# Altium PCB logi-cmos-7725-7670-NoFFC.PcbDoc
Units mil, origin at the board's own origin, x right, y up, seen from the top; angles counter-clockwise.
Board outline 1699 x 1365 mil, 2 copper layers (Top Layer, Bottom Layer); 24 components, 23 nets, 105 pads, 41 vias.
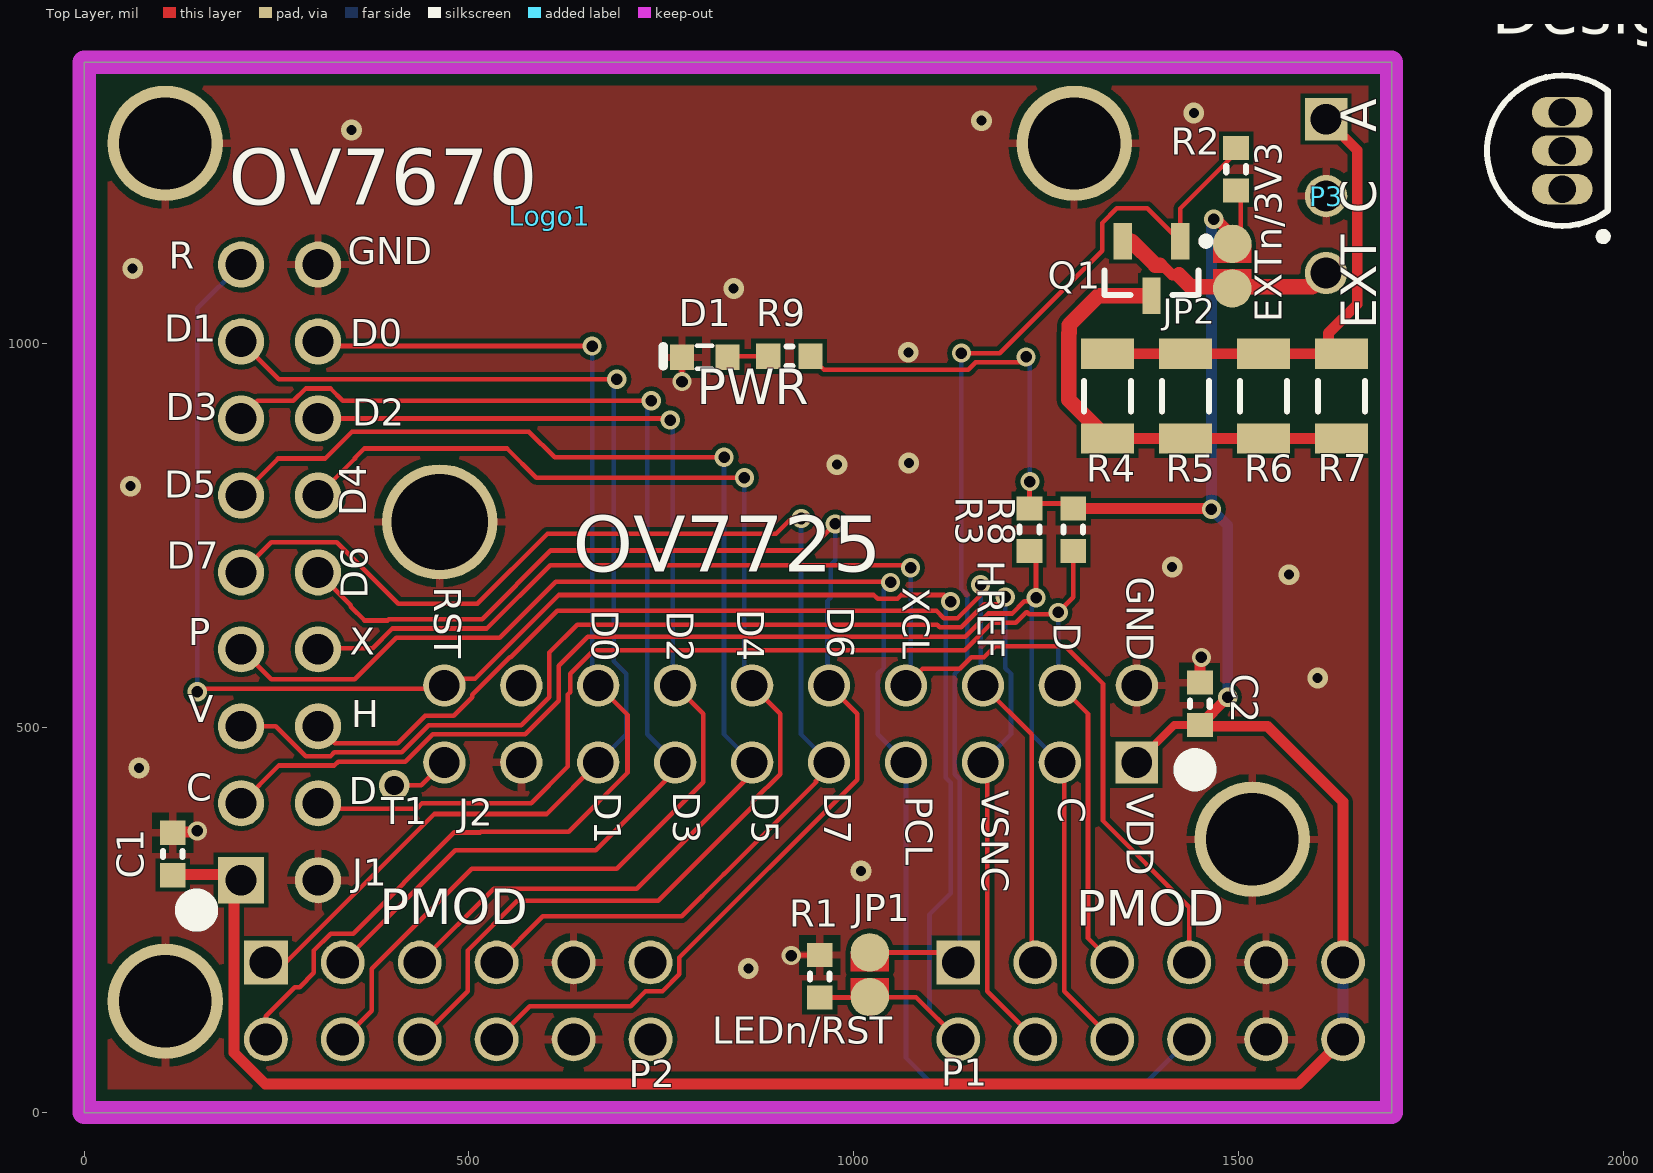
[diagram p0: Top Layer view]
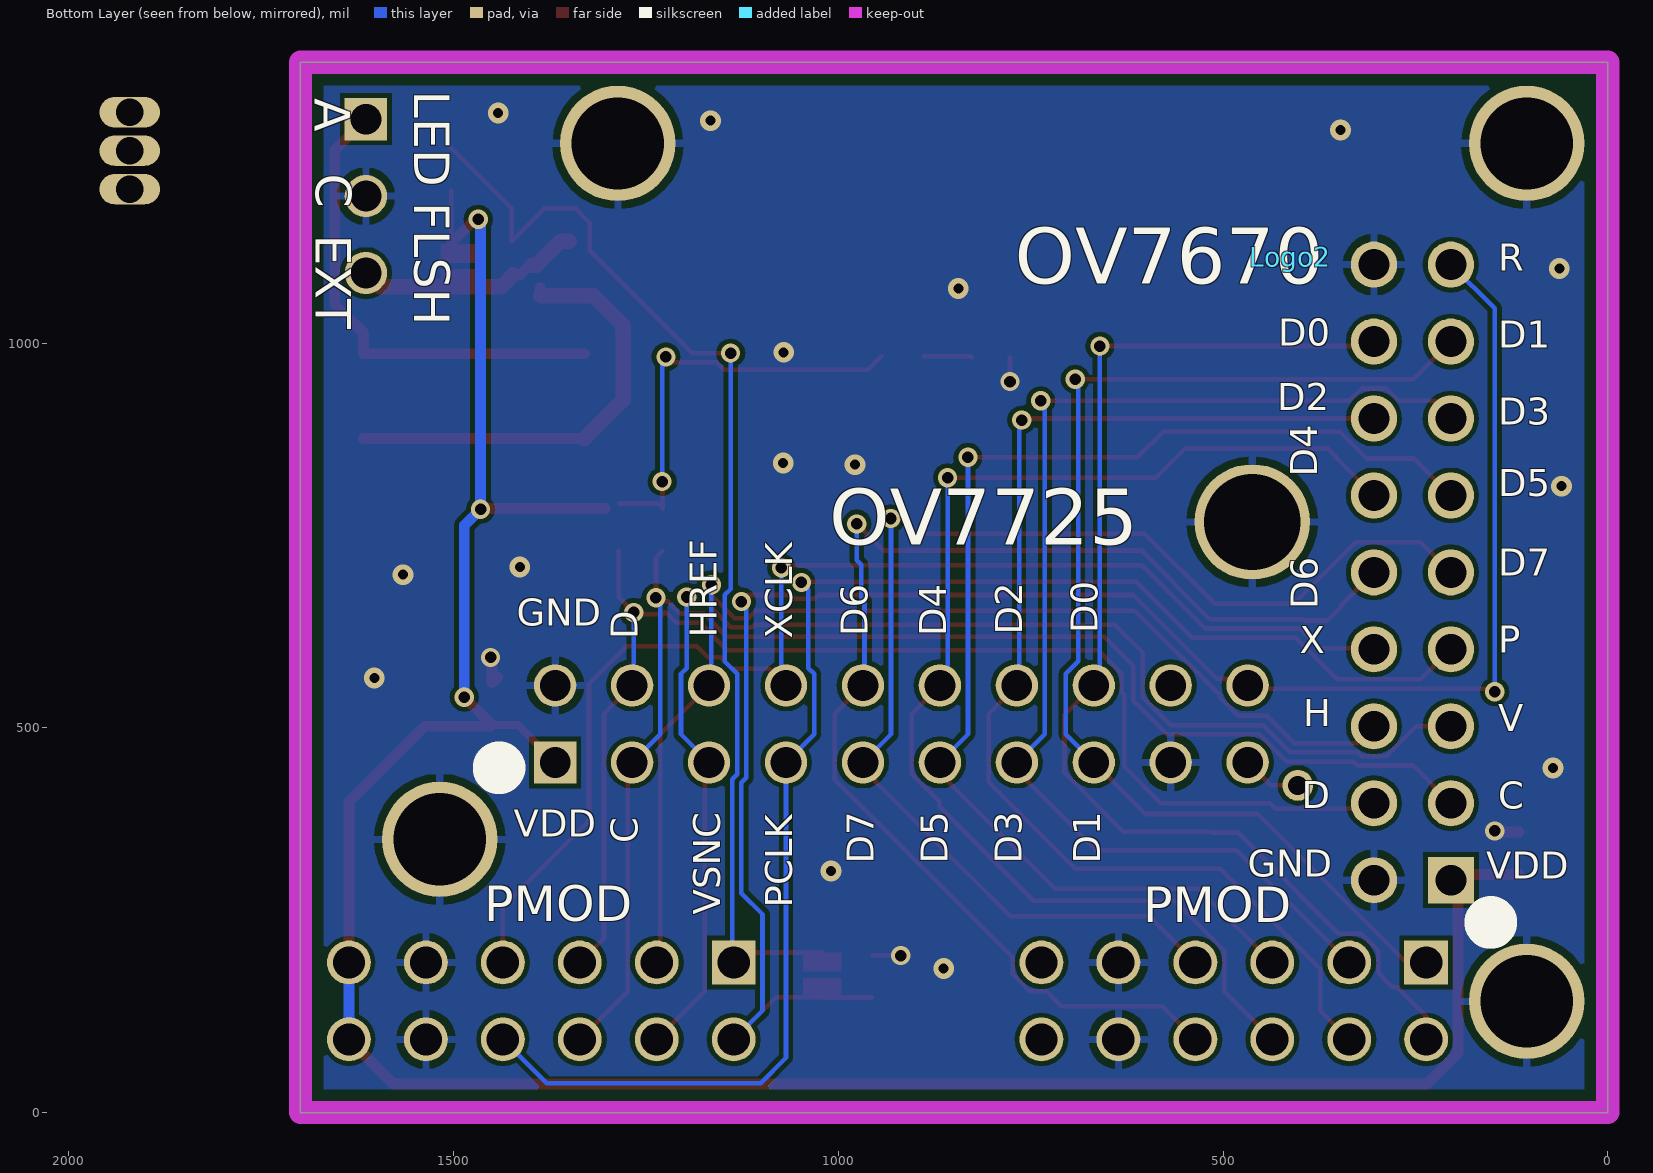
[diagram p1: Bottom Layer view, seen from below]
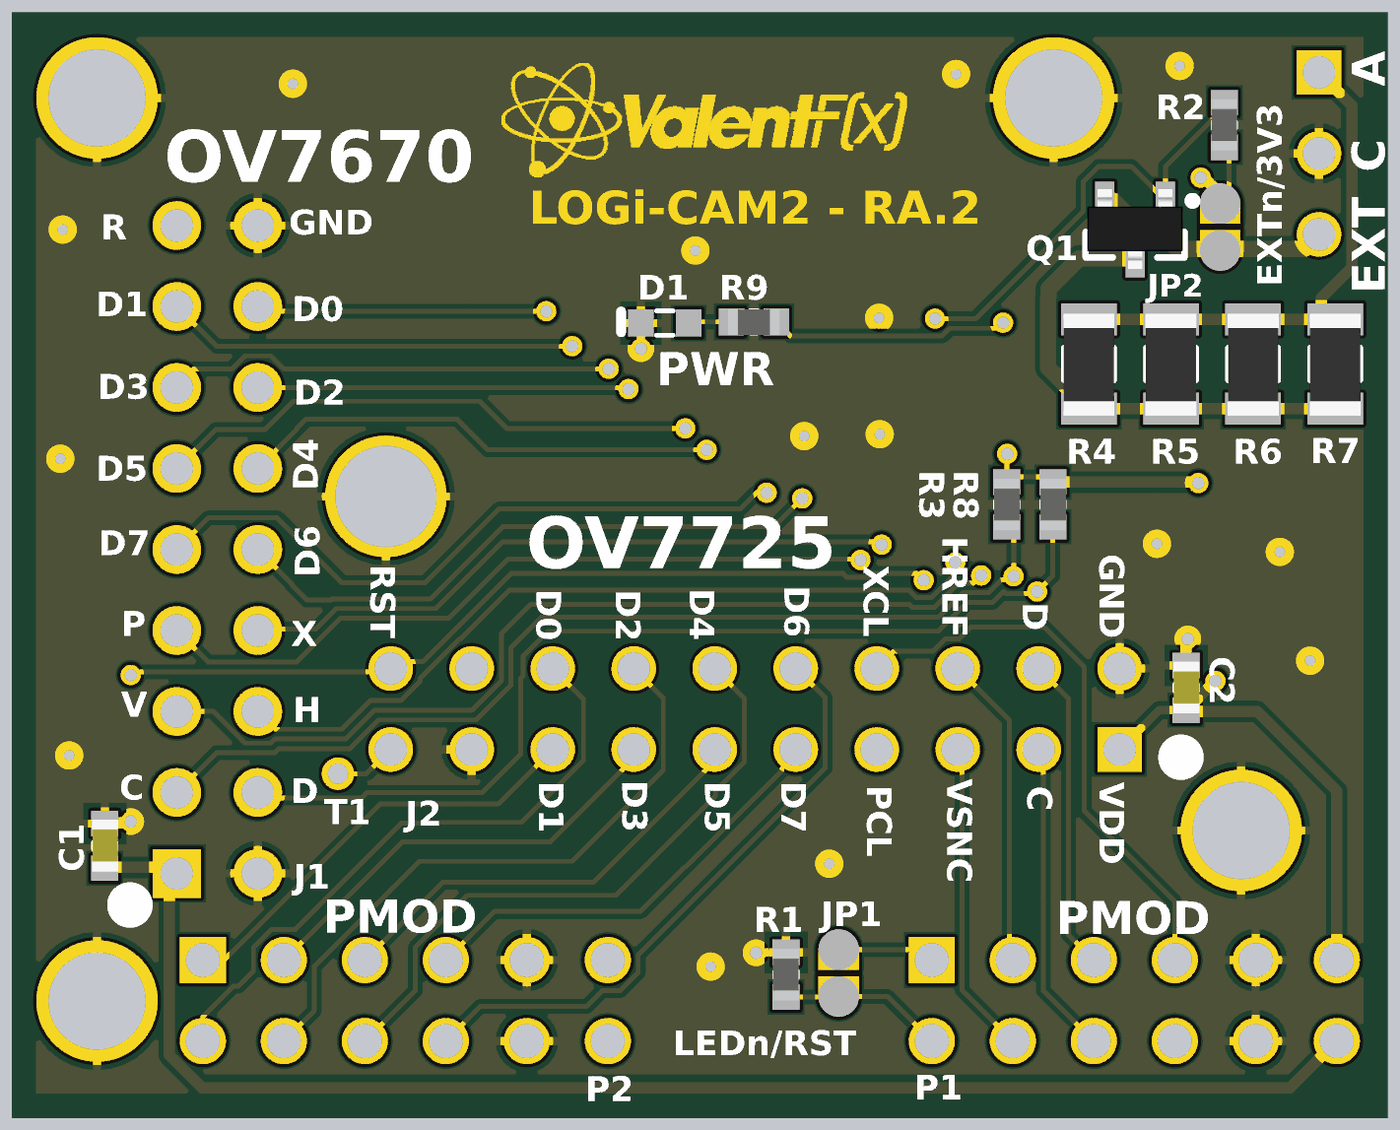
[diagram p2: 3D render of the assembled board from above, using the file's embedded part models]

## Layer stack, top to bottom
Top Solder: solder mask 0.4, Solder Resist, Dk 3.5
Top Layer: signal copper 1.4
Dielectric1: core 12.6, FR-4, Dk 4.8
Bottom Layer: signal copper 1.4
Bottom Solder: solder mask 0.4, Solder Resist, Dk 3.5

## Board outline
0,0 1699,0 1699,1365 0,1365

## Design rules (kind name [scope] priority, off if disabled: settings)
Clearance Keepout [onlayer('keep-out layer')] p1: gap=15
Clearance POLY_IN_BGA [(WithinRoom('BGA_INNER'))] p2: gap=6
Clearance POLY_TO_POLY [inpoly vs inpoly] p3: gap=12
Clearance [All] p4: gap=6
FabricationTestPointUsage TestPointUsage [All] p1: valid=0 allowmultiple=FALSE
FabricationTestpoint Testpoint [All] p1: side=3 testpointundercomponent=TRUE minsize=40 maxsize=100 preferedsize=60 minholesize=0 maxholesize=40 preferedholesize=32 testpointgrid=1 allowsidetop=TRUE allowsidebottom=TRUE usegrid=TRUE gridtolerance=0.01
PlaneClearance [All] p1: clearance=10
PolygonConnect "via connect" [isvia] p1: connectstyle=Direct reliefconductorwidth=10 reliefentries=4 polygonreliefangle="90 Angle" airgapwidth=10
PolygonConnect [All] p2: connectstyle=Relief reliefconductorwidth=10 reliefentries=4 polygonreliefangle="90 Angle" airgapwidth=10
RoutingVias [All] p1: holewidth=15 width=25 viastyle="Through Hole" minholewidth=15 minwidth=25 maxholewidth=28 maxwidth=50
SilkToSolderMaskClearance SilkscreenOverComponentPads [IsPad] p1: minsilkscreentomaskgap=10 clearancetoexposedcopper=TRUE
SolderMaskExpansion VIA [isvia and not(locked)] p1: expansion=-100
SolderMaskExpansion SolderMaskExpansion_1 [All] p2: expansion=4
Width [All] p1: maxlimit=20 minlimit=6 preferedwidth=14
25 further rules are at their usual default settings.

## Components (designator, comment, footprint, x,y, rotation, side; value= is the part's Value field where it differs from the comment)
C1 ".1uF" C0603 115,336 r90 top
C2 ".1uF" C0603 1450,531.19 r90 top
D1 "BLUE LED0603" "LED_0603 - BLUE" 806.41,981.46 r180 top
Designator3 "Comment" TO-92A 1921,1250 r0 top
J1 "OV7670 CAM HEADER" "HEADER_9x2_40_100 1-3-5 THRU DIP" 203.84,301.96 r90 top
J2 "OV7725 CAM HEADER" "HEADER_10x2_40_100 1-3-5 THRU DIP" 1368,455 r180 top locked
JP1 "Solder Jumper" SOLDER_JUMPER 1021,208 r90 top
JP2 "Solder Jumper" SOLDER_JUMPER 1492,1129 r90 top
Logo1 "Valent Logo 500" VALENTFX_500-SolderMask 605,1165 r0 top
Logo2 "Valent Logo 750" VALENTFX_750-SOLDERMASK-BOT 412.41,1112 r180 bottom
P1 "PRPC006DAAN-RC" "PMOD HEADER - Male" 1136,195 r180 top
P2 "PRPC006DAAN-RC" "PMOD HEADER - Male" 236,195 r180 top
P3 "Header3" "HEADER_3_40_100 THRU SIP" 1614,1291 r270 top
Q1 "IRLML6402GTRPBF" SOT-23 1387,1097 r270 top
R1 "4.7k" R0603 956,177 r90 top
R2 "4.7k" R0603 1497,1226 r270 top
R3 "4.7k" R0603 1228.5,757.5 r270 top
R4 "1206 - SMT" R1206 1330,931 r90 top
R5 "1206 - SMT" R1206 1431.33,931 r90 top
R6 "1206 - SMT" R1206 1532.67,931 r90 top
R7 "1206 - SMT" R1206 1634,931 r90 top
R8 "4.7k" R0603 1285.5,757.5 r270 top
R9 "220" R0603 916.41,982.96 r180 top
T1 "Test Point" "Tp 25-40" 402.8,425.14 r0 top

## Footprints (in the part's own frame and the unit in brackets; to place one, negate y for a bottom-side part, rotate by r counter-clockwise, add the part's x,y. Pads: shape width x height; smd on the part's side, far side on the other; paste and mask are expansions set on the pad)
C0603 [mm] "0603 Generic"
  rect 0.8x0.85 smd: 1(-0.7,0) 2(0.7,0)
  silkscreen extent -0.1,-0.33 0.1,0.33, body extent -0.8,-0.42 0.82,0.4, height 0.46
"HEADER_3_40_100 THRU SIP" [mil]
  rect 55x55 hole 40: 1(0,0)
  round 55 hole 40: 2(100,0) 3(200,0)
"HEADER_9x2_40_100 1-3-5 THRU DIP" [mil]
  rect 60x60 hole 40: 1(0,0)
  round 60 hole 40: 2(0,-100) 3(100,0) 4(100,-100) 5(200,0) 6(200,-100) 7(300,0) 8(300,-100) 9(400,0) 10(400,-100) 11(500,0) 12(500,-100) 13(600,0) 14(600,-100) 15(700,0) 16(700,-100) 17(800,0) 18(800,-100)
"HEADER_10x2_40_100 1-3-5 THRU DIP" [mil]
  rect 55x55 hole 40: 1(0,0)
  round 55 hole 40: 2(0,-100) 3(100,0) 4(100,-100) 5(200,0) 6(200,-100) 7(300,0) 8(300,-100) 9(400,0) 10(400,-100) 11(500,0) 12(500,-100) 13(600,0) 14(600,-100) 15(700,0) 16(700,-100) 17(800,0) 18(800,-100) 19(900,0) 20(900,-100)
"LED_0603 - BLUE" [mm] "LED_0603 - BLUE"
  rect 0.8x0.85 smd: A(-0.75,0) C(0.75,0)
  silkscreen extent -0.25,-0.38 1.37,0.38, body extent -0.8,-0.4 0.8,0.4, height 0.75
"PMOD HEADER - Male" [mil] "68021-212HLF"
  rect 57x57 hole 42: 1(0,0)
  round 57 hole 42: 2(-100,0) 3(-200,0) 4(-300,0) 5(-400,0) 6(-500,0) 7(0,100) 8(-100,100) 9(-200,100) 10(-300,100) 11(-400,100) 12(-500,100)
R0603 [mm] "0603 Generic"
  rect 0.8x0.85 smd: 1(-0.7,0) 2(0.7,0)
  silkscreen extent -0.1,-0.33 0.1,0.33, body extent -0.81,-0.41 0.81,0.41, height 0.46
R1206 [mm] "1206 Generic"
  rect 1x1.75 smd: 1(-1.4,0) 2(1.4,0)
  silkscreen extent -0.5,-0.77 0.5,0.77, body extent -1.63,-0.8 1.57,0.8, height 0.55
SOLDER_JUMPER [mil]
  round 50 smd: 1(0,0) 2(-58,0)
  Top Layer region: -32.91,25.01 -57.91,25.01 -57.91,-24.99 -32.91,-24.99
  Top Layer region: 0.09,25.01 -24.91,25.01 -24.91,-24.99 0.09,-24.99
SOT-23 [mm] "SOT-23"
  rect 1.2x0.6 smd: 1(-0.9,0.95) 2(-0.9,-0.95) 3(0.9,0)
  silkscreen extent -1.02,-1.55 0.87,1.93, body extent -1.27,-1.5 1.23,1.5, height 1.07
TO-92A [mm] "TO, Flat Index; 3 In-Line, Axial Leads; Body Dia. 4.5mm; Leads 0.51 x 0.48 mm (max)"
  oval 2x1 hole 0.9: 1(0,-1.27) 2(0,0) 3(0,1.27)
  silkscreen extent -2.48,-2.95 1.5,2.48, body extent -2.5,-2.5 1.5,2.5, height 6.86
"Tp 25-40" [mil]
  round 40 hole 25: 1(0,0)
VALENTFX_500-SolderMask [mil]
VALENTFX_750-SOLDERMASK-BOT [mil]

## Part data
C1 C2: library part "C0603 - C1608X7R1E104MT", ".10uF X7R 20% (MLCC) - SMD/SMT 0603 25volts"
D1: library part "LED0603 - HT-193NB-5589", "BLUE Standard LED - SMD Blue 470nm 40mcd 20mA"
J1: library part "CAM - OV7670", "CMOS CAMERA HEADER"
J2: library part "CAM - 0V7725", "CMOS CAMERA HEADER"
JP1 JP2: "Solder/Configuration Jumper"
P1 P2: library part "P-MOD - MTSW-106-07-G-D-130-RA"
P3: "Header  pin"
Q1: library part "PMOS - IRLML6402GTRPBF", "MOSFET P-CH 20V 3.7A SOT-23-3"
R1 R2 R3 R8: library part "R0603 - CRCW06034K70FKEA", "4.7k Thick Film Resistors - SMD 1/10watt 4.7Kohms 1%"
R4 R5 R6 R7: library part ERJ-8GEYJ271V, "RES 270 OHM 1/4W 5% 1206 SMD"
R9: library part "R0603 - ERJ-3EKF2200V", "220 - thick Film Resistors - SMD 0603 220ohms 1% Tol"
T1: library part "Test Point 2", "Test Point Smaller Symbol"

## Free pads (board coordinates)
  round 150 hole 120: MT(105.42,144.48) MT(105.42,1259.44) MT(1286.52,1259.44) MT(1518,355)
  round 150 hole 125: MT(462,767.5)

## Via types
v1: diameter 25, hole 15, Top Layer to Bottom Layer, 26 vias
v2: diameter 27, hole 13, Top Layer to Bottom Layer, 15 vias

## Nets (pads, with @x,y where several pads share a name; then routed paths per layer and width w, separated by ;. In a path a pad name is that pad's centre, name@x,y a point inside that pad or via, vN(x,y) a via of type N, cw(c..) or ccw(c..) an arc to the next point about the centre after c; other vN are vias at no path point)
3V3: C1.1 C2.1 J1.1 J2.1 JP2.1 P1.6 P1.12 R2.2 R3.1 R8.1 R9.1 | length 3952.3
  Top Layer w6: R9.1 961.43,965.5 1148.91,965.5 1158.41,975 1217,975 v1(1224,982) ; v1(1229,820) 1228.5,819.5 R3.1 1234.94,791.5 R8.1@1285.5,791.5 ; JP2.1@1502,1131 1503,1132 R2.2@1503,1198.44
  Top Layer w10: J2.1 1416.63,503.63 C2.1
  Top Layer w14: C1.1@115,309.44 196.36,309.44 J1.1 194.5,292.62 194.5,77.81 235.31,37 1578,37 P1.12 ; 1303,785.06 v1@1465,785.06 ; v1(1468,1161) 1472,1161 JP2.1@1502,1131 ; v1(1486.14,539.77) C2.1 1451.63,502 1537.88,502 1636,403.88 P1.6
  Bottom Layer w6: v1(1224,982) 1229,977 v1(1229,820)
  Bottom Layer w14: v1(1468,1161) 1465,1158 v1(1465,784) 1486.14,762.86 v1(1486.14,539.77) ; P1.12 P1.6
CTL_CLK: J1.3 J2.3 P1.9 R3.2 | length 1854.5
  Top Layer w6: J1.3 252.84,450.96 324.97,450.96 330.01,456 417.38,456 452.88,491.5 573.09,491.5 616.5,534.91 616.5,580.5 654.5,618.5 1144.85,618.5 1174.85,648.5 1205.91,648.5 1221.91,664.5 1232.5,664.5 v1(1237,669) 1237,721.44 R3.2 ; J2.3 1273.5,449.5 1273.5,157.5 P1.9
  Bottom Layer w6: v1(1237,669) 1231.5,663.5 1231.5,491.5 J2.3
CTL_DATA: J1.4 J2.4 P1.3 R8.2 | length 1713.5
  Top Layer w6: J1.4 310.8,395 432.01,395 438.97,401.96 580.77,401.96 628.5,449.7 628.5,543.25 631.5,546.25 631.5,570.12 662.38,601 1144.32,601 1179.82,636.5 1210.88,636.5 1224.38,650 1225.59,650 1228.09,647.5 1263.5,647.5 v1(1266,650) 1285.5,669.5 R8.2 ; J2.4 1304.5,518.5 1304.5,226.5 P1.3
  Bottom Layer w6: v1(1266,650) 1266,557 J2.4
D0: J1.16 J2.16 P2.7 | length 1580.7
  Top Layer w6: P2.7 236,125.27 273.5,162.77 279.87,162.77 298.5,181.41 298.5,210.53 320.47,232.5 349.59,232.5 481.09,364 514.53,364 515.53,365 629.62,365 706,441.38 706,517 J2.16 ; J1.16 309.65,996.16 571.58,996.16 v1(660,996.16)
  Bottom Layer w6: v1(660,996.16) 660,563 J2.16
D1: J1.15 J2.15 P2.1 | length 1569.7
  Top Layer w6: J1.15 252.84,952.96 v1(692,952.96) ; P2.1 262.09,195 455.09,388 601,388 J2.15
  Bottom Layer w6: J2.15 704.5,491.5 704.5,570.12 688,586.62 688,948.96 v1(692,952.96)
D2: J1.14 J2.14 P2.8 | length 1585.7
  Top Layer w6: J1.14 759.54,901.96 v1(761.5,900) ; P2.8 373.5,132.5 373.5,186.87 503.63,317 692,317 804.5,429.5 804.5,518.5 J2.14
  Bottom Layer w6: v1(761.5,900) 765,896.5 765,558 J2.14
D3: J1.13 J2.13 P2.2 | length 1563.3
  Top Layer w6: 225,925 271.73,925 287.69,940.96 320,940.96 335.96,925 v1(737,925) ; P2.2 482,341 665,341 773.5,449.5 J2.13
  Bottom Layer w6: v1(737,925) 731.5,919.5 731.5,491.5 J2.13
D4: J1.12 J2.12 P2.9 | length 1646.2
  Top Layer w6: J1.12 351.88,850 351.88,850.88 364,863 549.47,863 587.47,825 v1(858,825) ; P2.9 498.5,157.5 498.5,210.53 562.97,275 746,275 869,398 869,404.38 904.5,439.88 904.5,518.5 J2.12
  Bottom Layer w6: v1(858,825) 858,565 J2.12
D5: J1.11 J2.11 P2.3 | length 1635.4
  Top Layer w6: J1.11 251.88,850 313,850 348,885 577.97,885 611.47,851.5 v1(831.5,851.5) ; P2.3 532,291 718,291 868,441 J2.11
  Bottom Layer w6: v1(831.5,851.5) 831.5,491.5 J2.11
D6: J1.10 J2.10 P2.10 | length 1725
  Top Layer w6: J1.10 346.3,659.5 346.3,657.51 364.31,639.5 394.06,639.5 395.56,641 517.03,641 606.53,730.5 941.5,730.5 v1(976,765) ; P2.10 579.03,138.03 710.03,138.03 729.5,157.5 751.53,157.5 773.5,179.47 773.5,201.5 1004.5,432.5 1004.5,518.5 J2.10
  Bottom Layer w6: J2.10 965.97,557.03 965.97,665 970,669.03 970,712 976,718 v1(976,765)
D7: J1.9 J2.9 P2.4 | length 1669.6
  Top Layer w6: J1.9 242.84,740.96 328.07,740.96 408.03,661 511.03,661 602.03,752 899,752 919,772 v1(932,772) ; P2.4 596,255 776.5,255 831.5,310 831.86,310 951,429.14 951,431
  Bottom Layer w6: v1(932,772) 931.5,771.5 931.5,491.5 J2.9
EXT_PWR: JP2.2 P3.3 Q1.2 | length 286.9
  Top Layer w14: 1397.59,1098.19 1404.2,1098.19 1414.25,1088.13
  Top Layer w20: Q1.2 1360.76,1132.43 1392,1101.19 1397.59,1101.19 ; 1422.81,1088.69 1438.5,1073 1502,1073 1596,1073 P3.3
GND: C1.2 C2.2 D1.C J1.2 J1.18 J2.2 J2.17 P1.5 P1.11 P2.5 P2.11 P3.2 pad.MT R1.2 | length 140.1
  Top Layer w6: v1(776.88,949.96) D1.C ; v1(919,204) 919.56,204.56 R1.2
  Top Layer w14: C1.2@115,364.56 145.56,364.56 v1(147,366) ; C2.2@1443,565.75 C2.2 v1@1450,587.66
  other v1: 1452,591.5
  other v2: 863,187 1009.41,314 71,447.66 1603,564.65 1565.65,699 1414,709 60,814 978.48,842 1071.68,844.28 1071,988 844.11,1071.09 63,1096.96 347.19,1277 1166,1289 1442,1299
HREF: J1.6 J2.6 P1.2 | length 1493.6
  Top Layer w6: J1.6 325.8,480 407.44,480 442.94,515.5 480.12,515.5 504.5,539.88 504.5,543.12 552.88,591.5 554.5,591.5 615,652 1107.59,652 1117.09,642.5 1134.91,642.5 1165,672.59 v1(1165,686) ; J2.6 1231.5,491.5 1231.5,199.5 P1.2
  Bottom Layer w6: v1(1165,686) 1165,558 J2.6
LED_DRIVE: JP1.1 P1.1 Q1.1 R2.1 | length 1507.3
  Top Layer w6: JP1.1 1123,208 P1.1 ; v1(1140,987) 1190,987 1323,1120 1323,1156.06 1342,1175.06 1381.78,1175.06 Q1.1 1424.4,1174.96 R2.1@1503,1253.56
  Bottom Layer w6: P1.1@1117,214 P1.1 1138,197 1138,433.38 1131.5,439.88 1131.5,570.12 1147.5,586.12 1147.5,672.91 1140,680.41 v1(1140,987)
NetD1_A: D1.A R9.2 | length 62.9
  Top Layer w6: D1.A@826.56,981.46 828.06,982.96 R9.2
NetJ2_19: J2.19 T1.1 | length 77.6
  Top Layer w6: T1.1 438.14,425.14 J2.19
NetP3_1: P3.1 R4.2 R5.2 R6.2 R7.2 | length 624.2
  Top Layer w14: R4.2 1425.67,986.12 1521.33,986.12 1617,986.12 1617,1013 1654.5,1050.5 1654.5,1250.5 P3.1
NetQ1_3: Q1.3 R4.1 R5.1 R6.1 R7.1 | length 579.5
  Top Layer w14: R4.1 1425.67,875.88 1521.33,875.88 R7.1@1617,875.88 ; Q1.3@1387,1071.57 Q1.3@1388,1071.57
  Top Layer w20: R4.1 1279.55,926.33 1279.55,1012.88 1280,1013.33 1280,1023.57 1318,1061.57 Q1.3
PCLK: J1.7 J2.7 P1.10 | length 1958.6
  Top Layer w6: J1.7 242.84,562.96 351.46,562.96 405.5,617 540,617 613,690 1047,690 v1(1048,689)
  Bottom Layer w6: v1(1048,689) 1039,680 1039,577.62 1031.5,570.12 1031.5,491.5 J2.7 1068,71 1101,38 1379,38 P1.10
RST: J1.17 J2.20 JP1.2 P1.7 R1.1 | length 2421.6
  Top Layer w6: v1(147,547) 150.96,550.96 463.96,550.96 J2.20 476.81,563.81 507.81,563.81 616.59,672.59 1026,672.59 1031.09,667.5 1056.91,667.5 1062,672.59 1117.41,672.59 v1(1126,664) ; R1.1 1020.44,149.44 JP1.2 1081,150 P1.7
  Bottom Layer w6: v1(147,547) 147,1045.12 J1.17 ; v1(1126,664) 1119.5,657.5 1119.5,434.91 1126,428.41 1126,285 1098.5,257.5 1098.5,132.5 P1.7
VSYNC: J1.5 J2.5 P1.8 | length 1753.3
  Top Layer w6: J1.5 248.69,501.96 287.69,462.96 320,462.96 325.04,468 412.41,468 447.91,503.5 568.12,503.5 604.5,539.88 604.5,597.88 640.62,634 1108.62,634 1112.12,630.5 1139.88,630.5 1169.88,660.5 1187.5,660.5 v1(1197,670) ; J2.5 1173.5,449.5 1173.5,157.5 P1.8
  Bottom Layer w6: J2.5 1204.5,491.5 1204.5,570.12 1197,577.62 v1(1197,670)
XCLK: J1.8 J2.8 P1.4 | length 1678.3
  Top Layer w6: J1.8 305.38,603.5 375.03,603.5 400.53,629 523.03,629 605.53,711.5 1070.5,711.5 v1(1074,708) ; J2.8 1089.5,576.5 1137.88,576.5 1152.88,591.5 1169.41,591.5 1183.91,606 1275,606 1324,557 1324,379 1436,267 P1.4
  Bottom Layer w6: J2.8 1074,561 v1(1074,708)
pads on no net: Designator3.1 Designator3.2 Designator3.3 J2.18 P2.6 P2.12

## Polygon pours and split planes (outlines as drawn)
GND on Bottom Layer "GND_BOT" (solid, pour order 6): 2,0 2,1355 1693,1355 1693,0
GND on Top Layer "GND_TOP" (solid, remove dead copper, pour order 5): 0,2 0,1373 1715.95,1373 1715.95,2

## Keep-outs
Keep-Out Layer:
  the board outline again, w30

## Silkscreen, mask and mechanical layers (free items; w line width, h text height)
Top Overlay:
  circle w40: c146,263 r8.06
  circle w40: c1443.57,445.48 r8.06
  text "A" at 1695,1274 h80 r90
  text "C" at 1695,1168 h80 r90
  text "OV7670" at 188,1156 h125
  text "GND" at 342.15,1091 h60
  text "R" at 110,1085 h60
  text "EXTn/3V3" at 1568,1027 h60 r90
  text "EXT" at 1695,1018 h80 r90
  text "D1" at 104,990 h60
  text "D0" at 346,984 h60
  text "PWR" at 795.89,905 h80
  text "D3" at 106,888 h60
  text "D2" at 348,881 h60
  text "D5" at 104,787 h60
  text "D4" at 378,775 h60 r90
  text "HREF" at 1149.31,718.05 h60 r270
  text "GND" at 1343,696.5 h60 r270
  text "D7" at 107,695 h60
  text "RST" at 443,683.5 h60 r270
  text "XCL" at 1051.91,682.5 h60 r270
  text "OV7725" at 635,679 h125
  text "D6" at 380,668 h60 r90
  text "D6" at 954,657.39 h60 r270
  text "D4" at 837,654 h60 r270
  text "D0" at 647.66,653.39 h60 r270
  text "D2" at 745.66,652.39 h60 r270
  text "D" at 1248.31,636.5 h60 r270
  text "P" at 135,595.35 h60
  text "X" at 345,583 h60
  text "V" at 135,495.7 h60
  text "H" at 347,489 h60
  text "VSNC" at 1155,419 h60 r270
  text "D3" at 754,417 h60 r270
  text "D1" at 651,416 h60 r270
  text "D5" at 856,416 h60 r270
  text "D7" at 950,416 h60 r270
  text "VDD" at 1343,415 h60 r270
  text "PCL" at 1056,411 h60 r270
  text "C" at 1254,410 h60 r270
  text "C" at 132.82,393.22 h60
  text "D" at 344,389 h60
  text "PMOD" at 384,229 h80
  text "PMOD" at 1289,227 h80
  text "LEDn/RST" at 816.41,77.6 h60
Bottom Overlay:
  circle w60: c152,247 r4.12
  circle w60: c1441,448 r4.12
  text "LED FLSH" at 1567,1328 h80 r90
  text "A" at 1696,1318 h80 r90
  text "C" at 1695,1220 h80 r90
  text "EXT" at 1695,1141 h80 r90
  text "R" at 142.11,1082 h60
  text "OV7670" at 771,1053 h125
  text "D0" at 428,985 h60
  text "D1" at 142.11,982 h60
  text "D2" at 429.6,901 h60
  text "D3" at 142.11,882 h60
  text "D4" at 366,826 h60 r270
  text "D5" at 142.11,789 h60
  text "OV7725" at 1012,714 h125
  text "D7" at 142.11,686 h60
  text "D6" at 365,654 h60 r270
  text "D0" at 651,623.03 h60 r270
  text "D2" at 749,621.03 h60 r270
  text "GND" at 1418,621 h60
  text "D4" at 848,619.03 h60 r270
  text "D6" at 950,619.03 h60 r270
  text "HREF" at 1146,617.03 h60 r270
  text "XCLK" at 1048,616.03 h60 r270
  text "D" at 1249,615.26 h60 r270
  text "P" at 142.11,586 h60
  text "X" at 400.08,585 h60
  text "H" at 396.03,490 h60
  text "V" at 142.11,484 h60
  text "D" at 397.8,384 h60
  text "C" at 142.11,383 h60
  text "C" at 1249,350 h60 r270
  text "VDD" at 1422,347 h60
  text "D1" at 648,323 h60 r270
  text "D3" at 750,323 h60 r270
  text "D5" at 846,323 h60 r270
  text "D7" at 942,323 h60 r270
  text "GND" at 468,295 h60
  text "VDD" at 158,292 h60
  text "PCLK" at 1048,266 h60 r270
  text "VSNC" at 1142.01,256.99 h60 r270
  text "PMOD" at 1460,233 h80
  text "PMOD" at 604,232 h80
Top Solder:
  text "LOGi-CAM2 - RA.2" at 638.41,1104 h80
Bottom Solder:
  text "LOGi-CAM2 - RA.2" at 1350,1080 h60
  text "V2013.11.13.a.1" at 1347,1021 h80
Mechanical 2:
  lines w10: -582,85 -562,25 ; -582,3965 -562,4025 ; -572,25 -552,25 ; -572,4025 -552,4025 ; -562,1744.09 -562,25 ; -562,2305.91 -562,4025 ; -542,85 -562,25 ; -542,3965 -562,4025 ; -62,-385 -62,-365 ; -2,-395 -62,-375 ; -2,-355 -62,-375 ; 2157.09,-375 -62,-375 ; 2718.91,-375 4938,-375 ; 4878,-395 4938,-375 ; 4878,-355 4938,-375 ; 4938,-385 4938,-365
  text "4000 (mil)" at -526.01,1754.09 h60 r90
  text "5000 (mil)" at 2167.09,-410.99 h60
Mechanical 3:
  text "Specs" at 6438.89,3337.78 h60
  text "http://www.4pcb.com/index.php?load=content&page_id=131" at 6438.89,3237.78 h60
  text "Line/Space:" at 6438,3125 h60
  text "6 mil" at 7538,3125 h60
  text "Min Hole:" at 6438,3025 h60
  text "15 mil" at 7538,3025 h60
  text "Annular Ring Via:" at 6438,2925 h60
  text "10 mil" at 7538,2925 h60
  text "Annular Ring Comp Hole:" at 6438,2825 h60
  text "15 mil" at 7838,2825 h60
  text "Layers:" at 6438,2725 h60
  text "4" at 7538,2725 h60
  text "Copper:" at 6438,2625 h60
  text "1oz" at 7538,2625 h60
  text "Lead:" at 6438,2525 h60
  text "Lead Free" at 7538,2525 h60
  text "Plating:" at 6438,2425 h60
  text "Plated" at 7538,2425 h60
  text "Silkscreen:" at 6438,2325 h60
  text "Top / Bottom" at 7538,2325 h60
  text "Solder Mask:" at 6438,2225 h60
  text "Top Bottom - Green" at 7538,2225 h60
  text "Scoring - Tab:" at 6438,2125 h60
  text "None" at 7538,2125 h60
  text "Max Size:" at 6438,2025 h60
  text "30 in^2" at 7538,2025 h60
  text "Revisions" at 6438.89,1437.78 h60
  text "1" at 6438.89,1340.14 h60
  text "- Adding- ADC components to the top layer" at 6712,1327 h60
  text "- Moving the touch signals to bottom layer" at 6712,1227 h60
  text "Notes" at 6438,325 h60
Mechanical 16:
  lines w5: -4862,-1300 -4662,-1300 ; -4862,1475 -4662,1475 ; -4862,4250 -4662,4250 ; -2922,-4075 -2922,-3875 ; -2922,6825 -2922,7025 ; -987,-4075 -987,-3875 ; -987,6825 -987,7025 ; 948,-4075 948,-3875 ; 948,6825 948,7025 ; 2888,-4075 2888,-3875 ; 2888,6825 2888,7025 ; 4823,-4075 4823,-3875 ; 4823,6825 4823,7025 ; 5938,-3575 10438,-3575 ; 5938,-3275 10438,-3275 ; 6758,-4075 6758,-3875 ; 6758,6825 6758,7025 ; 7438,-3875 7438,-3275 7438,-2975 5938,-2975 5938,-3875 ; 8698,-4075 8698,-3875 ; 8698,6825 8698,7025 ; 9538,-3875 9538,-3275 ; 10438,-2975 4538,-2975 4538,-3875 5938,-3875 ; 10438,-2675 10438,-3875 ; 10438,-1300 10638,-1300 ; 10438,1475 10638,1475 ; 10438,4250 10638,4250 ; 5938,-3875 10438,-3875 ; 10438,-3875 -4662,-3875 -4662,6825 10438,6825 10438,-3875 ; -4862,-4075 -4862,7025 10638,7025 10638,-4075 -4862,-4075
  text "1" at -3915.66,6890 h60
  text "2" at -1985,6890 h60
  text "3" at -45.66,6890 h60
  text "4" at 1895,6890 h60
  text "5" at 3835,6890 h60
  text "6" at 5765,6890 h60
  text "7" at 7715,6890 h60
  text "8" at 9645,6890 h60
  text "A" at -4787,5552 h60
  text "A" at 10513,5552 h60
  text "B" at -4787,2772 h60
  text "B" at 10513,2772 h60
  text "C" at -4787,-8 h60
  text "C" at 10513,-8 h60
  text "D" at -4787,-2768 h60
  text "D" at 10513,-2768 h60
  text "PCB DESIGNER:" at 5988,-3070 h60
  text "TITLE:" at 7538,-3075 h60
  text "Michael Jones" at 6053,-3205 h60
  text "Group VIII Technology" at 4778,-3305 h60
  text "DATE:" at 5988,-3375 h60
  text "PART NO.:" at 7488,-3375 h60
  text "REV:" at 9588,-3375 h60
  text "1652 W 820 N" at 4778,-3405 h60
  text ".PRINT_DATE" at 6038,-3495 h60
  text "Provo, UT 84601" at 4778,-3505 h60
  text "801/379-0118" at 4778,-3605 h60
  text "FILE NAME:" at 5988,-3675 h60
  text "DWG NO:" at 7488,-3675 h60
  text "SCALE:" at 9588,-3675 h60
  text ".PCB_FILE_NAME_NO_PATH" at 6038,-3795 h60
  text "1" at -3915.66,-4010 h60
  text "2" at -1985,-4010 h60
  text "3" at -45.66,-4010 h60
  text "4" at 1895,-4010 h60
  text "5" at 3835,-4010 h60
  text "6" at 5765,-4010 h60
  text "7" at 7715,-4010 h60
  text "8" at 9645,-4010 h60